# Allegro board front-cover-dvt2-0701.brd
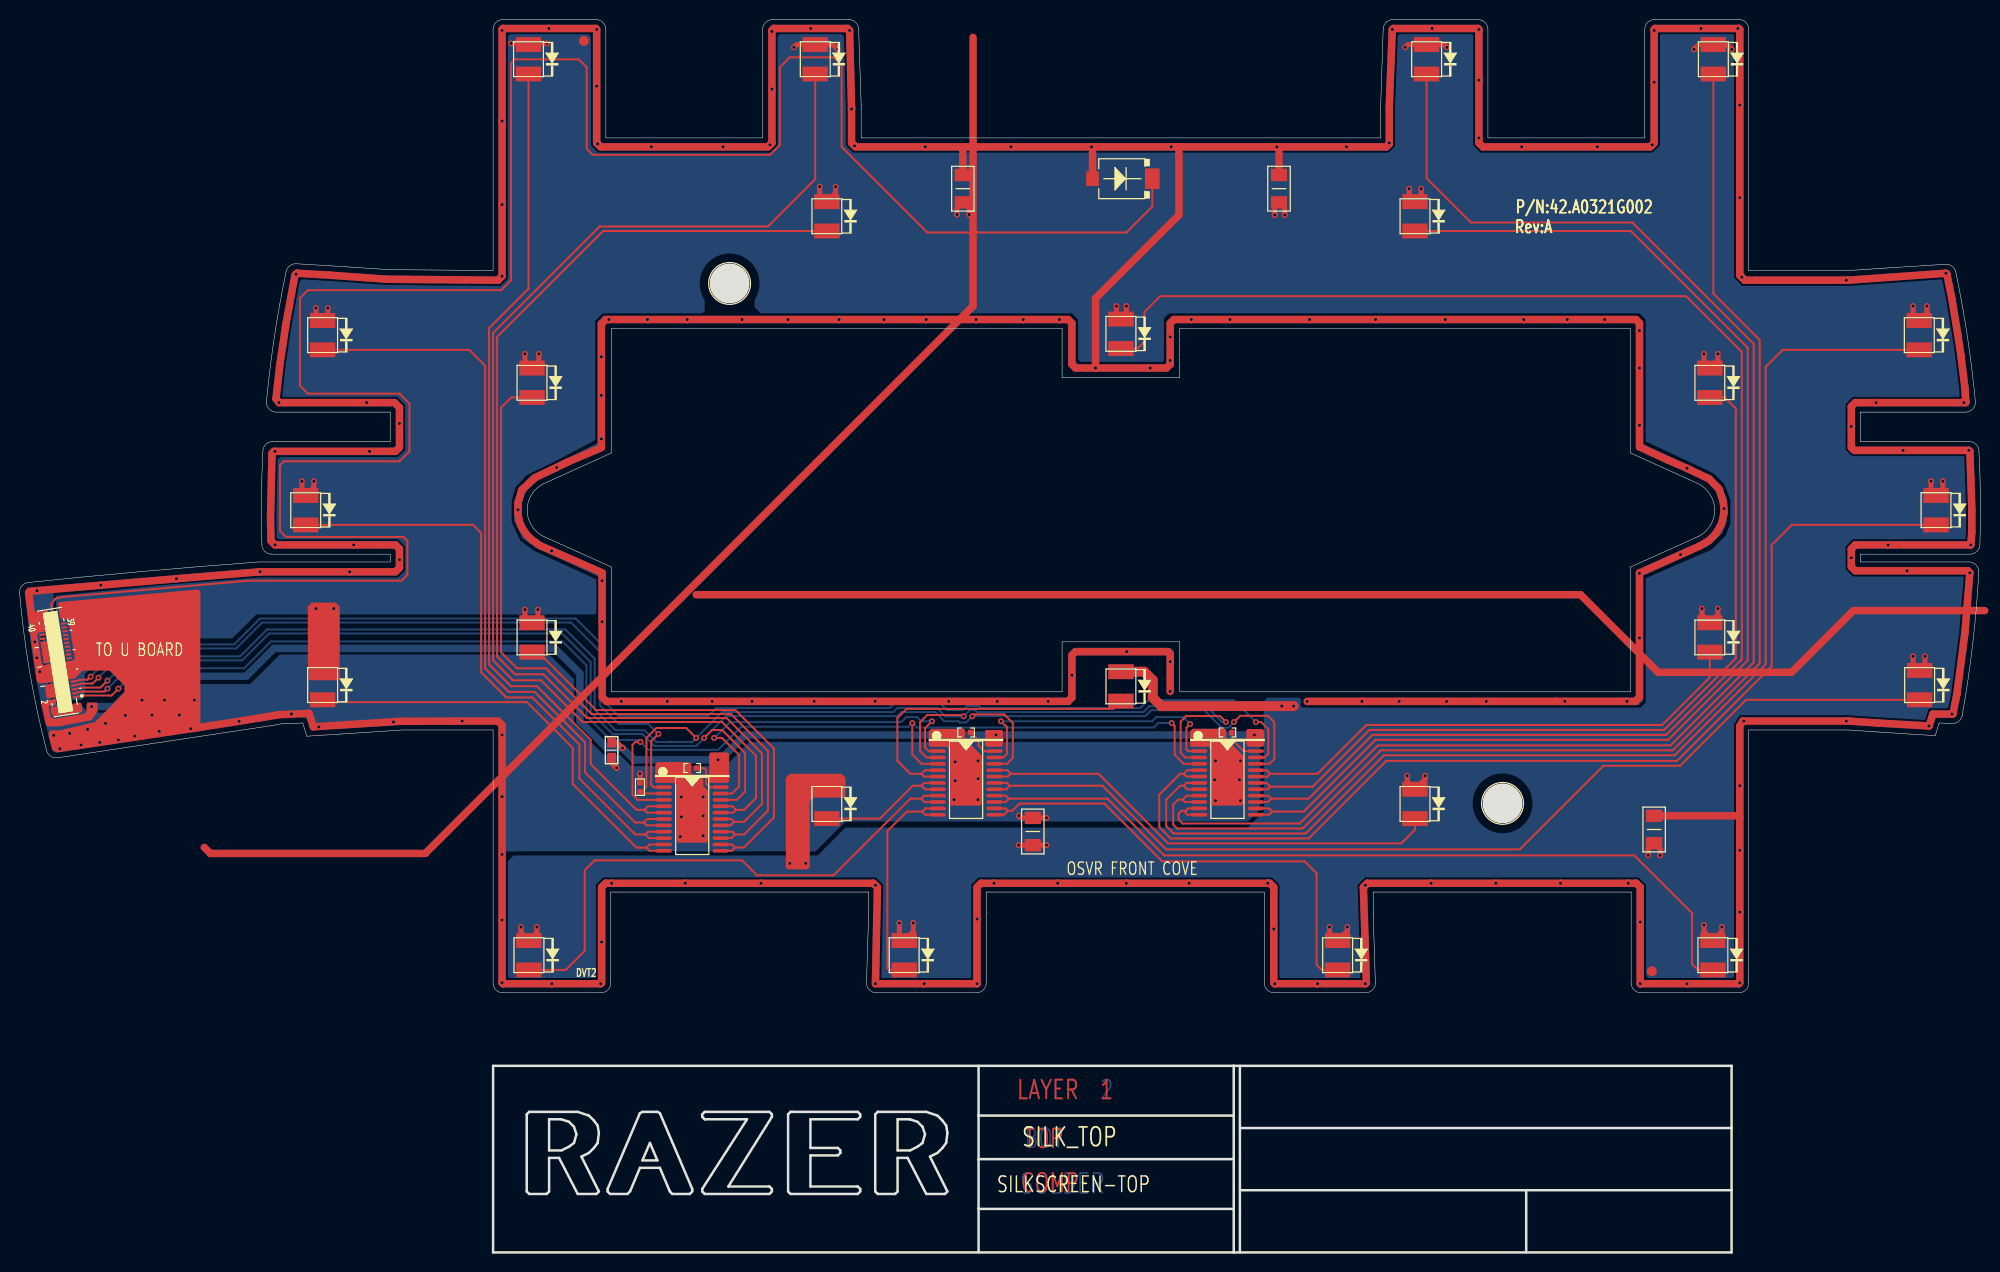
[diagram p0: board, top side]
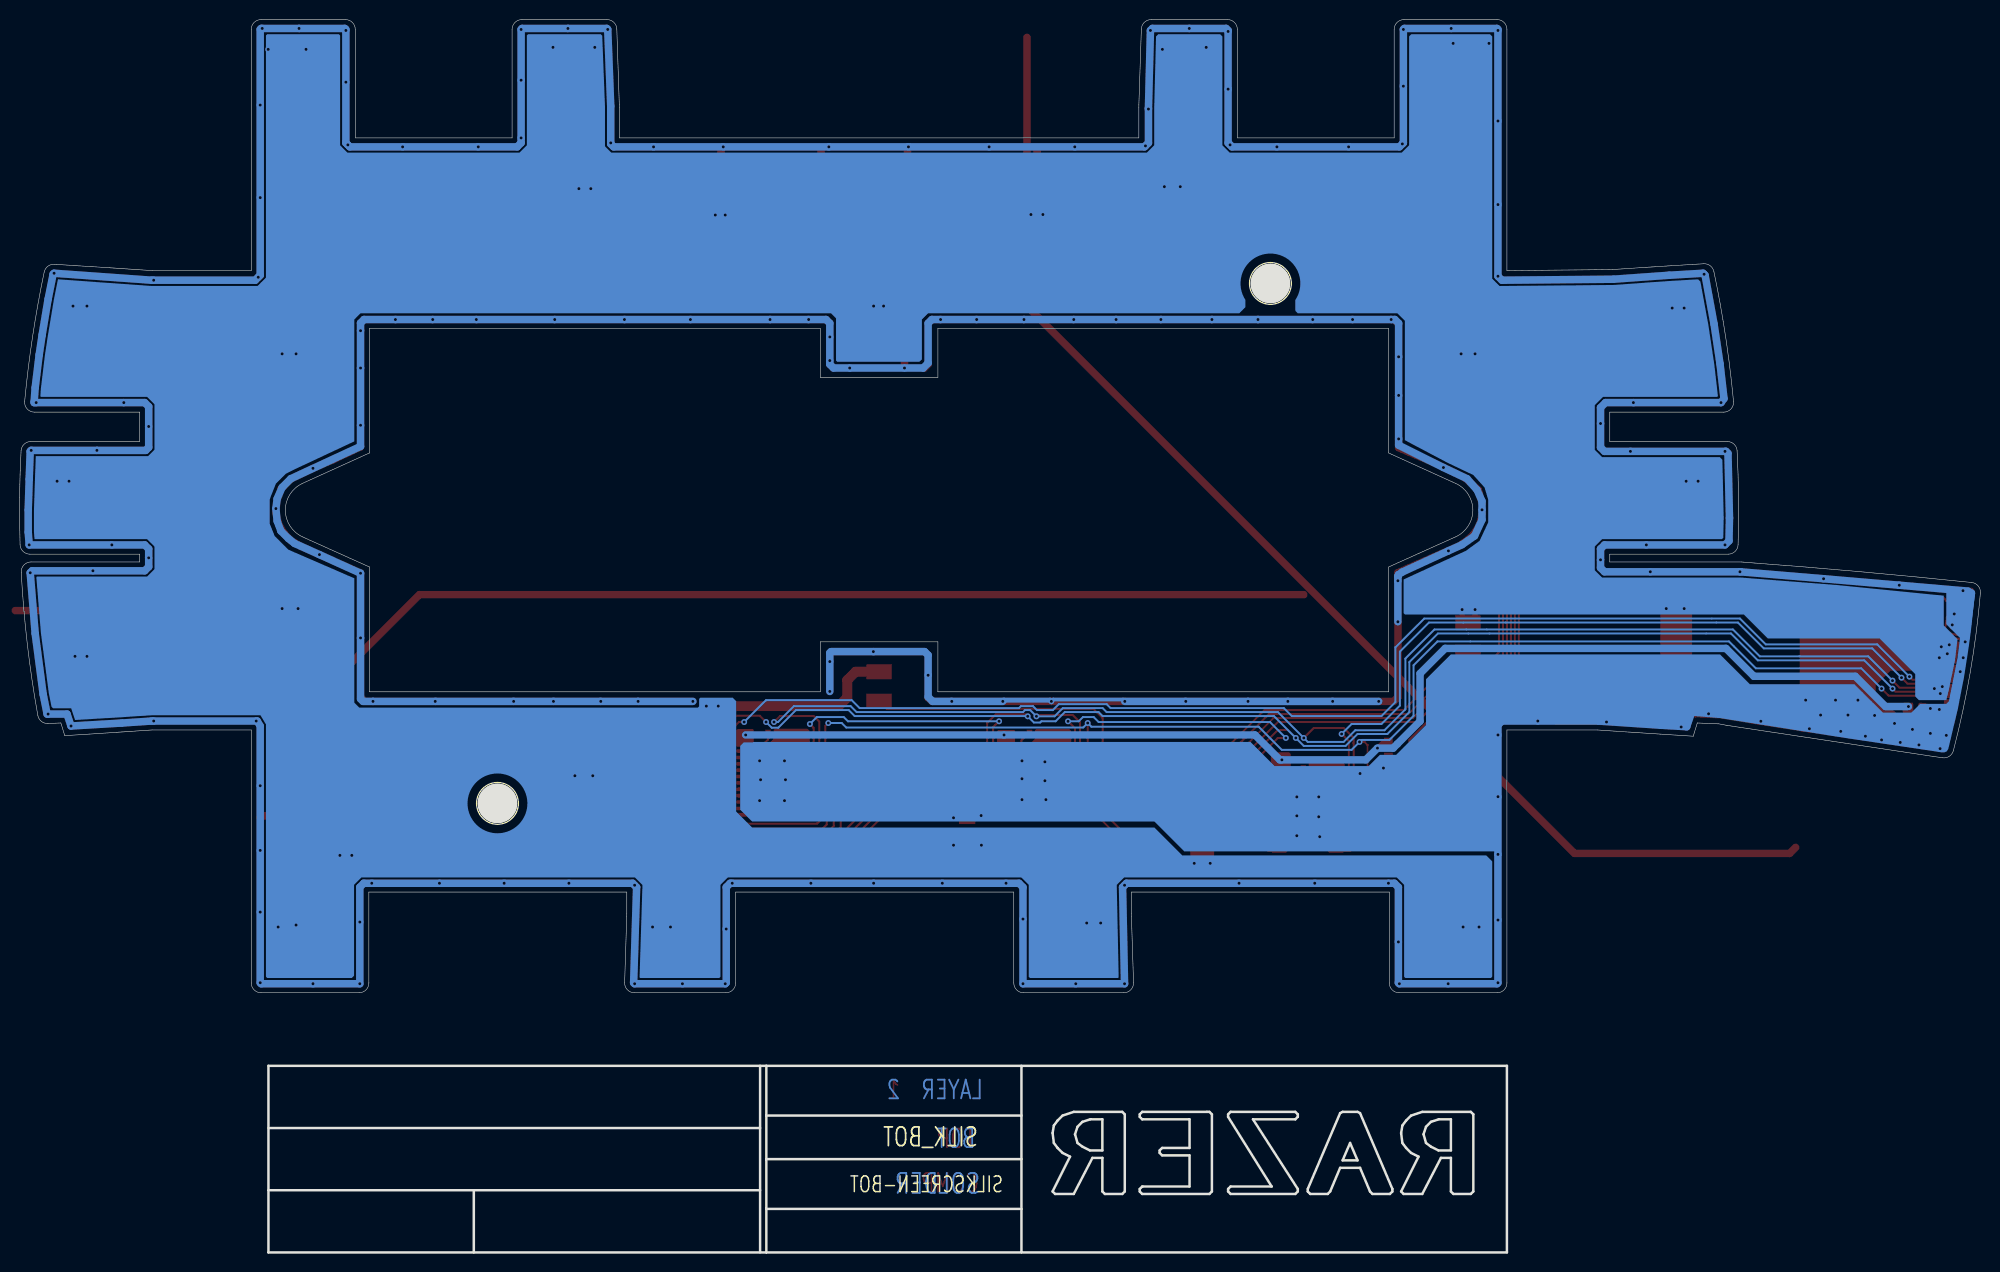
[diagram p1: board, bottom side, seen from below]

Outline 200.06 x 125.87 mm; copper layers: TOP, BOTTOM. Coordinates in mm from the lower left corner of the outline.
Outline path: 190.13,53.1 186.56,53.34 176.43,53.34 176.43,27.51 arc(176.14,26.8) 175.43,26.51 165.43,26.51 arc(164.72,26.8) 164.43,27.51 164.43,36.79 138.11,36.79 138.11,34.62 arc(138.11,34.46) 138.12,34.31 138.33,27.54 arc(138.05,26.82) 137.33,26.51 128,26.51 arc(127.3,26.8) 127,27.51 127,36.79 98.63,36.79 98.63,27.51 arc(98.33,26.8) 97.63,26.51 87.41,26.51 arc(86.69,26.82) 86.41,27.54 86.62,34.31 arc(86.63,34.46) 86.63,34.62 86.63,36.79 60.31,36.79 60.31,27.51 arc(60.02,26.8) 59.31,26.51 49.31,26.51 arc(48.6,26.8) 48.31,27.51 48.31,53.34 39.07,53.34 32.66,52.92 29.3,52.71 arc(29.09,53.38) 28.89,54.06 26.69,53.97 25.95,53.83 25.76,53.8 3.87,50.5 arc(3.17,50.66) 2.75,51.24 arc(1.04,59.22) 0,67.32 arc(0.23,68.05) 0.89,68.4 arc(12.53,69.53) 24.18,70.48 24.4,70.5 37.81,70.5 37.81,71.29 25.72,71.29 arc(25.03,71.58) 24.72,72.26 arc(24.68,77.05) 24.82,81.84 arc(25.13,82.52) 25.82,82.79 37.81,82.79 37.81,85.79 26.19,85.79 arc(25.45,86.12) 25.19,86.89 arc(25.65,90.98) 26.24,95.06 26.28,95.26 arc(26.41,96.05) 26.55,96.84 arc(26.86,98.5) 27.19,100.15 arc(27.57,100.74) 28.23,100.94 29.36,100.88 arc(31.74,100.73) 34.12,100.58 37.57,100.35 48.31,100.24 48.31,124.87 arc(48.6,125.58) 49.31,125.87 58.81,125.87 arc(59.52,125.58) 59.81,124.87 59.81,113.79 75.81,113.79 75.81,124.87 arc(76.11,125.58) 76.81,125.87 84.61,125.87 arc(85.31,125.59) 85.61,124.91 85.86,117.23 arc(85.86,117.07) 85.87,116.92 85.87,113.79 138.87,113.79 138.87,116.92 arc(138.87,117.07) 138.88,117.23 139.13,124.91 arc(139.43,125.59) 140.13,125.87 148.81,125.87 arc(149.52,125.58) 149.81,124.87 149.81,113.79 165.81,113.79 165.81,124.87 arc(166.11,125.58) 166.81,125.87 175.43,125.87 arc(176.14,125.58) 176.43,124.87 176.43,100.24 186.49,100.24 190.92,100.54 ; 190.92,100.54 arc(193.6,100.71) 196.27,100.88 ; 192.97,52.92 arc(191.55,53.01) 190.13,53.1 ; 192.97,52.92 195.46,52.76 arc(195.65,53.41) 195.85,54.06 197.18,54 arc(197.84,54.22) 198.2,54.83 arc(199.28,62.11) 199.9,69.44 arc(199.63,70.19) 198.9,70.5 187.81,70.5 187.81,71.29 199.02,71.29 arc(199.71,71.58) 200.02,72.26 arc(200.06,74.66) 200.06,77.06 arc(200.05,77.73) 200.04,78.39 arc(200.03,78.92) 200.01,79.45 arc(200.01,79.65) 200,79.85 arc(199.96,80.85) 199.91,81.84 arc(199.6,82.52) 198.92,82.79 187.81,82.79 187.81,85.79 198.55,85.79 arc(199.29,86.12) 199.55,86.89 arc(198.74,93.52) 197.55,100.1 arc(197.18,100.69) 196.52,100.89 196.27,100.88 ; 53.56,73.05 arc(51.79,75.78) 53.55,78.52 60.37,81.62 60.37,94.34 106.37,94.34 106.37,89.34 118.37,89.34 118.37,94.34 164.37,94.34 164.37,81.62 171.19,78.52 arc(172.95,75.78) 171.18,73.05 164.37,69.99 164.37,57.24 118.37,57.24 118.37,62.34 106.37,62.34 106.37,57.24 60.37,57.24 60.37,69.99 53.56,73.05

## Placement (name value [footprint] x y rotation side)
C301  10uF  [C0603]  60.4 51.28 270 top
C302  47uF  [C1206]  103.38 42.98 90 top
C303  NC_47uF  [C1206]  166.78 43.18 90 top
C304  47uF  [C1206]  128.5 108.61 90 top
C305  NC_47uF  [C1206]  96.24 108.61 90 top
C306  22PF  [C0402]  63.3 47.5 90 top
FPC  TP_1mm  [TPC30T]  112.52 116.84 0 top
LED17  SFH 4253  [OSRAM_SFH4253]  51.92 121.82 0 top
LED18  SFH 4253  [OSRAM_SFH4253]  30.91 93.65 0 top
LED19  SFH 4253  [OSRAM_SFH4253]  29.19 75.78 0 top
LED20  SFH 4253  [OSRAM_SFH4253]  30.92 57.92 0 top
LED21  SFH 4253  [OSRAM_SFH4253]  52.28 62.79 0 top
LED22  SFH 4253  [OSRAM_SFH4253]  52.28 88.79 0 top
LED23  SFH 4253  [OSRAM_SFH4253]  82.37 105.79 0 top
LED24  SFH 4253  [OSRAM_SFH4253]  81.18 121.82 0 top
LED25  SFH 4253  [OSRAM_SFH4253]  112.37 57.79 0 top
LED26  SFH 4253  [OSRAM_SFH4253]  82.37 45.79 0 top
LED27  SFH 4253  [OSRAM_SFH4253]  51.97 30.34 0 top
LED28  SFH 4253  [OSRAM_SFH4253]  90.26 30.34 0 top
LED29  SFH 4253  [OSRAM_SFH4253]  134.48 30.34 0 top
LED30  SFH 4253  [OSRAM_SFH4253]  172.77 30.34 0 top
LED31  SFH 4253  [OSRAM_SFH4253]  193.86 57.92 0 top
LED32  SFH 4253  [OSRAM_SFH4253]  142.37 45.79 0 top
LED33  SFH 4253  [OSRAM_SFH4253]  195.54 75.78 0 top
LED34  SFH 4253  [OSRAM_SFH4253]  193.82 93.65 0 top
LED35  SFH 4253  [OSRAM_SFH4253]  172.82 121.82 0 top
LED36  SFH 4253  [OSRAM_SFH4253]  143.56 121.82 0 top
LED37  SFH 4253  [OSRAM_SFH4253]  142.37 105.79 0 top
LED38  SFH 4253  [OSRAM_SFH4253]  112.37 93.79 0 top
LED39  SFH 4253  [OSRAM_SFH4253]  172.46 88.79 0 top
LED40  SFH 4253  [OSRAM_SFH4253]  172.46 62.79 0 top
LED41  BPW34S-Z  [BPW34S]  112.52 109.63 0 top
M1  HOLEC47040N_NPTH  [HOLEC158D158N]  72.44 98.93 0 top
M2  HOLEC47040N_NPTH  [HOLEC158D158N]  151.31 45.85 0 top
NOREF  -  [unnamed]  57.58 123.7 0 top
NOREF#2  -  [#2]  48.31 0 0 top
NOREF#3  -  [unnamed]  166.55 28.7 0 top
P300  JAE-WP7B-S040VA1  [JAE_WP7B-SXXXVA1]  3.91 60.27 279 top
R300  330  [R0402]  68.63 49.45 0 top
R301  330  [R0402]  96.57 53.09 0 top
R302  330  [R0402]  123.24 53.09 0 top
U300  STP16CPC26XTR  [TSSOP24-G]  68.63 44.58 270 top
U301  STP16CPC26XTR  [TSSOP24-G]  96.57 48.26 270 top
U302  STP16CPC26XTR  [TSSOP24-G]  123.24 48.26 270 top

## Library data of the parts
C301-C306 = CAP_0
FPC = T POINT R
LED17-LED40 = LED55BF/TO_3
LED41 = LED55BF/TO_1
M1 M2 = Mounting Hole
P300 = CON34_0
R300-R302 = R_RP_3
U300-U302 = STP16CPC26XTR_0

## Footprints (pads in the part's own frame, mm; a bottom-side part is the same pattern mirrored in y, then rotated)
BPW34S
  rect 1.295x1.499 smd: A(-3.05,0)
  rect 1.499x2.108 smd: C(3.05,0)
C0402
  rect 0.559x0.559 smd: 1(-0.457,0) 2(0.457,0)
C0603
  rect 1.016x0.889 smd: 1(-0.775,0) 2(0.775,0)
C1206
  rect 1.27x1.651 smd: 1(-1.397,0) 2(1.397,0)
HOLEC158D158N
  round 4.013 hole 4.013 unplated: (0,0)
JAE_WP7B-SXXXVA1
  rect 0.229x0.533 smd: 1(3.8,1.2) 2(3.8,-1.2) 3(3.4,1.2) 4(3.4,-1.2) 5(3,1.2) 6(3,-1.2) 7(2.6,1.2) 8(2.6,-1.2) 9(2.2,1.2) 10(2.2,-1.2) 11(1.8,1.2) 12(1.8,-1.2) 13(1.4,1.2) 14(1.4,-1.2) 15(1,1.2) 16(1,-1.2) 17(0.6,1.2) 18(0.6,-1.2) 19(0.2,1.2) 20(0.2,-1.2) 21(-0.2,1.2) 22(-0.2,-1.2) 23(-0.6,1.2) 24(-0.6,-1.2) 25(-1,1.2) 26(-1,-1.2) 27(-1.4,1.2) 28(-1.4,-1.2) 29(-1.8,1.2) 30(-1.8,-1.2) 31(-2.2,1.2) 32(-2.2,-1.2) 33(-2.6,1.2) 34(-2.6,-1.2) 35(-3,1.2) 36(-3,-1.2) 37(-3.4,1.2) 38(-3.4,-1.2) 39(-3.8,1.2) 40(-3.8,-1.2)
  rect 0.762x0.508 smd: S1(-4.85,1.2) S2(-4.85,-1.2) S3(4.85,1.2) S4(4.85,-1.2)
OSRAM_SFH4253
  rect 2.591x1.524 smd: A(0,1.5) C(0,-1.5)
R0402
  rect 0.559x0.559 smd: 1(-0.457,0) 2(0.457,0)
TPC30T
  round 0 smd: 1(0,0)
TSSOP24-G
  oval 0.381x1.651 smd: 1(-3.575,-2.9) 2(-2.925,-2.9) 3(-2.275,-2.9) 4(-1.625,-2.9) 5(-0.975,-2.9) 6(-0.325,-2.9) 7(0.325,-2.9) 8(0.975,-2.9) 9(1.625,-2.9) 10(2.275,-2.9) 11(2.925,-2.9) 12(3.575,-2.9) 13(3.575,2.9) 14(2.925,2.9) 15(2.275,2.9) 16(1.625,2.9) 17(0.975,2.9) 18(0.325,2.9) 19(-0.325,2.9) 20(-0.975,2.9) 21(-1.625,2.9) 22(-2.275,2.9) 23(-2.925,2.9) 24(-3.575,2.9)
  rect 4.978x3.2 smd: 25(0,0)
unnamed
  round 1.016 smd: 1(0,0)

## Nets
2.8V_FPC_F: C302.1 C303.1 C304.1 C305.1 LED17.A(ANODE) LED18.A(ANODE) LED19.A(ANODE) LED20.A(ANODE) LED21.A(ANODE) LED22.A(ANODE) LED23.A(ANODE) LED24.A(ANODE) LED25.A(ANODE) LED26.A(ANODE) LED27.A(ANODE) LED28.A(ANODE) LED29.A(ANODE) LED30.A(ANODE) LED31.A(ANODE) LED32.A(ANODE) LED33.A(ANODE) LED34.A(ANODE) LED35.A(ANODE) LED36.A(ANODE) LED37.A(ANODE) LED38.A(ANODE) LED39.A(ANODE) LED40.A(ANODE) P300.4 P300.6 P300.8 P300.10 P300.22 P300.24 P300.26 P300.28 P300.30 P300.32
3.3V_FPC_F: C301.1 P300.2 U300.24(VDD) U301.24(VDD) U302.24(VDD)
DGND_FPC_F: C301.2 C302.2 C303.2 C304.2 C305.2 C306.2 LED41.A(ANODE) P300.11 P300.12 P300.13 P300.14 P300.15 P300.16 P300.17 P300.18 P300.19 P300.20 P300.38 P300.40 P300.S1 P300.S2 P300.S3 P300.S4 R300.1(L) R301.1(L) R302.1(L) U300.1(GND) U300.25(THM_G) U301.1(GND) U301.25(THM_G) U302.1(GND) U302.25(THM_G)
DRVCLK_FPC_F: C306.1 P300.5 U300.3(CLK) U301.3(CLK) U302.3(CLK)
IR_LED_IN_F: LED41.C(CATHODE) P300.36
LATEN_FPC_F: P300.1 U300.4(LE) U301.4(LE) U302.4(LE)
LED17: LED17.C(CATHODE) U300.5(OD0) U300.6(OD1)
LED18: LED18.C(CATHODE) U300.7(OD2) U300.8(OD3)
LED19: LED19.C(CATHODE) U300.9(OD4) U300.10(OD5)
LED20: LED20.C(CATHODE) U300.11(OD6) U300.12(OD7)
LED21: LED21.C(CATHODE) U300.13(OD8) U300.14(OD9)
LED22: LED22.C(CATHODE) U300.15(OD10) U300.16(OD11)
LED23: LED23.C(CATHODE) U300.17(OD12) U300.18(OD13)
LED24: LED24.C(CATHODE) U300.19(OD14) U300.20(OD15)
LED25: LED25.C(CATHODE) U301.5(OD0) U301.6(OD1)
LED26: LED26.C(CATHODE) U301.7(OD2) U301.8(OD3)
LED27: LED27.C(CATHODE) U301.9(OD4) U301.10(OD5)
LED28: LED28.C(CATHODE) U301.11(OD6) U301.12(OD7)
LED29: LED29.C(CATHODE) U301.13(OD8) U301.14(OD9)
LED30: LED30.C(CATHODE) U301.15(OD10) U301.16(OD11)
LED31: LED31.C(CATHODE) U301.17(OD12) U301.18(OD13)
LED32: LED32.C(CATHODE) U301.19(OD14) U301.20(OD15)
LED33: LED33.C(CATHODE) U302.5(OD0) U302.6(OD1)
LED34: LED34.C(CATHODE) U302.7(OD2) U302.8(OD3)
LED35: LED35.C(CATHODE) U302.9(OD4) U302.10(OD5)
LED36: LED36.C(CATHODE) U302.11(OD6) U302.12(OD7)
LED37: LED37.C(CATHODE) U302.13(OD8) U302.14(OD9)
LED38: LED38.C(CATHODE) U302.15(OD10) U302.16(OD11)
LED39: LED39.C(CATHODE) U302.17(OD12) U302.18(OD13)
LED40: LED40.C(CATHODE) U302.19(OD14) U302.20(OD15)
OUTEN_FPC_F: P300.3 U300.21(O\E\) U301.21(O\E\) U302.21(O\E\)
R_EXT_F1: R300.2(R) U300.23(R-EXT)
R_EXT_F2: R301.2(R) U301.23(R-EXT)
R_EXT_F3: R302.2(R) U302.23(R-EXT)
SDI_FPC_F: P300.7 U300.2(SDI)
SDO_FPC_F_101: U300.22(SDO) U301.2(SDI)
SDO_FPC_F_102: U301.22(SDO) U302.2(SDI)
SDO_FPC_F_103: P300.9 U302.22(SDO)

Pads without a net: FPC 1; NOREF 1; NOREF#3 1; P300 21 23 25 27 29 31 33 34 35 37 39

## Via types
v1: diameter 0.61, hole 0.305, TOP to BOTTOM, 304 vias

## Routing (per net, layer and track width the routed paths; a pad name or vN(x,y) marks a point on that pad's centre or on a via; arc(x,y) is an arc through that point)
2.8V_FPC_F: length 108.1
  TOP w0.508: v1(50.14,123.44) 51.8,123.44 LED17.A 52.04,123.44 v1(53.8,123.44) ; v1(129.08,105.92) 129.08,106.63 C304.1 128.07,106.78 v1(128.07,105.92) ; v1(194.41,60.86) 194.41,59.97 LED31.A 193.19,60.09 v1(193.19,60.86) ; v1(166.17,40.54) 166.17,41.17 C303.1 167.39,41.17 v1(167.39,40.54) ; v1(195.02,78.74) 195.02,77.8 LED33.A 196.24,77.98 v1(196.24,78.74) ; v1(133.65,33.22) 133.65,32.67 LED29.A 135.48,32.85 v1(135.48,33.22) ; v1(141.38,123.04) 141.66,123.32 LED36.A 145.36,123.32 v1(145.64,123.04) ; v1(171.86,91.74) 171.86,90.89 LED39.A 173.28,91.11 v1(173.28,91.74) ; v1(52.78,33.22) 52.78,32.66 LED27.A 51.15,32.66 v1(51.15,33.22) ; v1(141.78,108.61) 141.78,107.88 LED37.A 143,107.92 v1(143,108.61) ; v1(96.87,105.97) 96.87,106.58 C305.1 95.66,106.63 v1(95.66,105.97) ; v1(170.84,122.83) 171.33,123.32 LED35.A 174.21,123.32 v1(174.7,122.83) ; v1(52.98,91.74) 52.98,90.99 LED22.A 51.56,91.01 v1(51.56,91.74) ; v1(111.91,96.62) 111.91,95.75 LED38.A 112.93,95.85 v1(112.93,96.62) ; v1(143.41,48.67) 143.41,48.33 LED32.A 141.58,48.08 v1(141.58,48.67) ; v1(173.28,65.74) 173.28,65.11 LED40.A 171.65,65.09 v1(171.65,65.74) ; v1(194.61,96.62) 194.61,95.94 LED34.A 193.19,95.79 v1(193.19,96.62) ; v1(51.56,65.63) 51.56,65.01 LED21.A 52.88,64.89 v1(52.88,65.63) ; v1(31.44,96.42) 31.44,95.68 LED18.A 30.23,95.84 v1(30.23,96.42) ; v1(104.77,41.58) C302.1 v1(101.93,41.58) ; v1(78.99,123.04) 79.28,123.32 LED24.A 82.98,123.32 v1(83.46,122.83) ; v1(91.19,33.63) 91.19,32.77 LED28.A 89.76,32.34 v1(89.76,33.63) ; v1(30.02,78.74) 30.02,78.11 LED19.A 28.8,77.67 v1(28.8,78.74) ; v1(81.63,108.81) 81.63,108.02 LED23.A 83.26,108.18 v1(83.26,108.81) ; v1(173.68,33.22) 173.68,32.76 LED30.A 171.86,32.76 v1(171.86,33.43)
  TOP w1.016: v1(130,55.78) v1(128.78,55.78) 116.48,55.78 115.62,56.64 115.62,58.42 114.75,59.29 LED25.A
  vias: v1(3.18,62.04) v1(3.38,61.12) v1(3.89,57.77) v1(3.99,61.83) v1(4.09,57.06) v1(4.19,60.72) v1(4.7,57.57) v1(30.23,65.74) v1(32.05,65.74) v1(78.59,39.73) v1(80.21,39.73)
3.3V_FPC_F: length 131.3
  TOP w0.381: 99.47,52.68 v1(99.62,52.83)
  TOP w0.508: v1(61.52,51.49) 60.95,52.06 C301.1
  BOTTOM w0.762: v1(125.98,52.83) v1(99.62,52.83) 74.01,52.83 71.47,50.29 v1(71.27,50.29) 62.71,50.29 v1(61.52,51.49) 59.92,51.49 57.17,54.23 57.17,59.11 54.61,61.67 25.96,61.67 23.11,58.83 12.77,58.83 9.68,55.74 v1(7.34,55.74)
DGND_FPC_F: length 2230.8
  TOP w0.381: R301.1 96.11,51.52 ; 96.11,51.52 95.88,51.75 ; 96.11,51.52 96.57,51.07 U301.25
  TOP w0.508: v1(60.91,49.45) 60.4,49.96 C301.2 ; v1(104.77,44.37) C302.2 102.18,44.37 v1(101.95,44.6) ; C306.2 v1(63.3,48.9)
  TOP w0.762: C303.2 175.34,44.58 175.51,44.4 ; v1(109.78,90.3) 107.75,90.3 107.37,90.68 107.37,94.87 106.98,95.25 v1(106.1,95.25) v1(102.41,95.25) v1(97.59,95.25) v1(92.51,95.25) v1(88.19,95.25) v1(83.62,95.25) v1(78.41,95.25) v1(73.71,95.25) v1(68.12,95.25) v1(64.06,95.25) v1(60.12,95.25) 59.82,95.25 59.36,94.79 v1(59.36,91.44) v1(59.36,87.5) v1(59.36,83.06) 59.36,82.17 55.8,80.65 52.63,79.12 51.23,77.85 50.85,76.45 v1(50.85,75.82) 50.85,75.44 50.98,74.68 51.23,74.04 51.74,73.28 52.3,72.75 53.14,72.16 59.44,69.39 v1(59.44,68.58) v1(59.44,64.39) 59.44,56.69 59.87,56.26 v1(61.39,56.26) v1(66.09,56.26) v1(70.66,56.26) v1(74.73,56.26) v1(81.08,56.26) v1(87.3,56.26) v1(94.79,56.26) v1(99.75,56.26) v1(104.95,56.26) 106.98,56.26 107.37,56.64 v1(107.37,58.93) 107.37,60.96 107.75,61.34 v1(112.95,61.34) 117.14,61.34 117.4,61.09 v1(117.4,60.33) v1(117.4,57.28) ; v1(109.78,90.3) v1(115.37,90.3) 117.02,90.3 117.4,90.68 v1(117.4,91.06) v1(117.4,93.47) 117.4,94.87 117.78,95.25 v1(119.56,95.25) v1(123.49,95.25) v1(131.62,95.25) v1(138.35,95.25) v1(145.47,95.25) v1(153.47,95.25) v1(157.91,95.25) v1(161.72,95.25) 164.92,95.25 165.28,94.89 v1(165.28,94.11) v1(165.28,90.3) v1(165.28,84.45) 165.28,82.25 168.17,80.9 v1(170.13,80.06) 172.39,78.97 173.41,77.93 173.84,76.58 173.91,75.51 173.63,74.35 173.07,73.41 172.36,72.67 171.4,72.11 165.3,69.39 165.28,69.37 v1(165.28,69.34) v1(165.28,62.74) 165.28,56.69 164.85,56.26 v1(164.01,56.26) v1(157.66,56.26) v1(149.66,56.26) v1(145.59,56.26) v1(140.77,56.26) v1(136.96,56.26) v1(131.37,56.26) ; v1(109.78,90.3) 109.78,97.41 118.29,105.92 118.29,112.88 ; C305.2 96.24,112.8 96.32,112.88 ; 175.51,44.4 v1(175.51,47.65) 175.51,53.75 175.82,54.25 v1(175.92,54.25) v1(186.38,54.25) 186.59,54.25 189.64,54.05 v1(194.82,53.75) 195.22,54.97 v1(197.15,54.97) 197.26,54.97 197.66,57 198.47,63.2 v1(198.98,69.39) 198.78,69.6 v1(192.58,69.6) 187.3,69.6 186.89,70 v1(186.89,70.92) 186.89,71.83 187.3,72.24 v1(190.65,72.24) v1(199.08,72.24) 199.19,73.56 199.19,75.79 199.08,78.94 198.98,81.79 v1(198.88,81.89) v1(192.18,81.89) 187.2,81.89 186.89,82.19 v1(186.89,84.33) 186.89,86.36 187.3,86.77 v1(189.43,86.77) v1(198.37,86.77) 198.58,86.77 198.58,86.87 198.47,88.29 198.07,91.64 197.76,93.68 197.15,97.33 196.65,99.87 v1(196.54,99.97) 186.59,99.26 v1(186.38,99.26) 176.02,99.26 v1(175.72,99.57) 175.51,99.77 v1(175.51,107.7) v1(175.51,117.14) 175.51,124.87 175.41,124.97 v1(175.31,124.97) v1(171.55,124.97) 166.88,124.97 166.78,124.87 v1(166.78,124.76) v1(166.78,119.48) 166.78,113.28 v1(166.57,113.08) 166.37,112.88 v1(160.98,112.88) v1(153.26,112.88) 149.3,112.88 148.89,113.28 v1(148.89,113.79) v1(148.89,119.68) v1(148.89,124.87) 148.79,124.97 v1(144.12,124.97) 140.16,124.97 v1(140.05,124.87) 139.75,117.04 v1(139.75,113.28) 139.75,113.18 139.45,112.88 v1(135.38,112.88) v1(128.27,112.88) ; 175.51,44.4 v1(175.51,41.05) v1(175.51,34.75) v1(175.51,27.53) 175.41,27.43 v1(170.13,27.43) v1(165.35,27.43) v1(165.35,33.73) 165.35,37.29 164.95,37.69 v1(164.13,37.69) v1(157.23,37.69) v1(150.62,37.69) v1(144.02,37.69) 137.51,37.69 v1(137.31,37.49) 137.11,37.29 137.41,27.53 v1(137.31,27.43) v1(132.43,27.43) v1(128.07,27.43) 127.96,27.53 v1(127.96,33.02) 127.96,37.29 127.56,37.69 v1(127.35,37.69) v1(119.33,37.69) v1(112.93,37.69) v1(105.92,37.69) v1(99.41,37.69) 98.09,37.69 97.69,37.29 v1(97.69,34.04) v1(97.69,27.43) v1(92.3,27.43) v1(87.32,27.43) 87.53,37.29 v1(87.32,37.49) 87.12,37.69 v1(75.64,37.69) v1(67.92,37.69) v1(60.4,37.69) 59.79,37.69 59.38,37.29 v1(59.38,31.7) 59.38,27.53 v1(59.28,27.43) v1(54.3,27.43) 49.33,27.43 v1(49.22,27.53) v1(49.22,33.93) v1(49.22,40.64) v1(49.22,46.53) v1(49.22,52.83) 49.22,53.85 48.82,54.25 v1(45.16,54.25) 38.86,54.23 37.26,54.13 29.97,53.67 29.54,55.04 29.08,55.02 26.26,54.89 ; v1(17.45,53.47) v1(22.4,54.23) 26.26,54.86 ; LED41.A 109.47,112.78 v1(109.37,112.88) ; 96.32,112.88 v1(92.4,112.88) 85.29,112.88 v1(85.19,112.98) 84.89,113.28 v1(84.89,116.74) 84.89,116.84 v1(84.68,124.76) 84.48,124.97 v1(80.72,124.97) 76.96,124.97 76.76,124.76 v1(76.76,124.66) v1(76.76,118.77) 76.76,113.28 v1(76.55,113.08) 76.35,112.88 v1(71.78,112.88) v1(64.46,112.88) 59.28,112.88 v1(58.98,113.18) 58.88,113.28 v1(58.88,119.08) v1(58.88,124.87) 58.77,124.97 v1(54,124.97) 49.33,124.97 49.22,124.87 v1(49.22,124.76) v1(49.22,115.52) v1(49.22,106.98) v1(49.22,99.67) 48.82,99.26 37.44,99.36 31.75,99.77 28.29,99.97 v1(28.19,99.87) 28.09,99.77 27.18,94.79 26.57,90.73 26.16,87.17 v1(26.47,86.77) v1(35.41,86.77) 38.25,86.77 38.76,86.26 v1(38.76,84.63) 38.76,82.19 38.35,81.79 v1(35.71,81.79) v1(26.06,81.79) 25.96,81.79 25.75,81.58 25.6,74.98 25.65,72.64 v1(26.06,72.24) v1(34.09,72.24) 38.35,72.24 38.76,71.83 v1(38.76,70.71) 38.76,69.9 38.35,69.49 v1(33.68,69.49) v1(24.54,69.49) ; 96.32,112.88 v1(101.14,112.88) v1(109.37,112.88) ; v1(128.27,112.88) 118.29,112.88 ; v1(128.27,112.88) 128.5,112.65 C304.2 ; 118.29,112.88 v1(117.5,112.88) v1(109.37,112.88) ; v1(24.54,69.49) v1(16,68.78) v1(8.28,68.12) v1(1.78,67.56) 1.02,67.49 0.94,67.39 0.96,67.06 1.04,66.41 1.25,64.78 ; v1(24.54,69.49) 24.43,69.49
  BOTTOM w0.381: v1(94.79,56.26) 94.6,56.45 87.49,56.45 v1(87.3,56.26)
  BOTTOM w0.508: v1(99.75,56.26) 99.62,56.39 94.92,56.39 v1(94.79,56.26)
  BOTTOM w0.762: v1(117.4,57.28) v1(117.4,60.33) 117.4,61.21 117.27,61.34 v1(112.95,61.34) 107.72,61.34 107.37,60.99 v1(107.37,58.93) 107.37,56.72 106.91,56.26 v1(104.95,56.26) v1(99.75,56.26) ; v1(131.37,56.26) v1(136.96,56.26) v1(140.77,56.26) v1(145.59,56.26) v1(149.66,56.26) v1(157.66,56.26) v1(164.01,56.26) 165.02,56.26 165.28,56.52 v1(165.28,62.74) v1(165.28,69.34) v1(169.47,71.25) 172.01,72.39 172.64,72.9 173.41,73.66 173.79,74.68 v1(173.91,75.95) 173.79,76.96 173.28,78.11 172.39,78.99 165.28,82.3 v1(165.28,84.45) v1(165.28,90.3) v1(165.28,94.11) 165.28,94.89 164.92,95.25 v1(161.72,95.25) v1(157.91,95.25) v1(153.47,95.25) v1(145.47,95.25) v1(138.35,95.25) v1(131.62,95.25) v1(123.49,95.25) v1(119.56,95.25) 117.78,95.25 117.4,94.87 v1(117.4,93.47) v1(117.4,91.06) 117.4,90.68 117.02,90.3 v1(115.37,90.3) v1(109.78,90.3) 107.87,90.3 107.37,90.81 107.37,94.87 106.98,95.25 v1(106.1,95.25) v1(102.41,95.25) v1(97.59,95.25) v1(92.51,95.25) v1(88.19,95.25) v1(83.62,95.25) v1(78.41,95.25) v1(73.71,95.25) v1(68.12,95.25) v1(64.06,95.25) v1(60.12,95.25) 59.74,95.25 59.36,94.87 v1(59.36,91.44) v1(59.36,87.5) v1(59.36,83.06) 59.36,82.42 v1(54.79,80.14) 52.37,78.99 51.36,77.85 50.85,76.71 v1(50.85,75.82) 50.85,74.8 51.61,73.15 52.88,72.26 v1(54.28,71.63) 58.98,69.47 59.38,69.2 59.41,69.04 59.44,69.01 v1(59.44,68.58) v1(59.44,64.39) ; v1(61.39,56.26) v1(66.09,56.26) v1(70.66,56.26) v1(74.73,56.26) v1(81.08,56.26) v1(87.3,56.26) ; v1(24.54,69.49) v1(33.68,69.49) 38.35,69.49 38.76,69.9 v1(38.76,70.71) 38.76,71.83 38.35,72.24 v1(34.09,72.24) v1(26.06,72.24) 25.65,72.64 25.6,74.98 25.75,81.58 25.96,81.79 v1(26.06,81.79) v1(35.71,81.79) 38.35,81.79 38.76,82.19 v1(38.76,84.63) 38.76,86.26 38.25,86.77 v1(35.41,86.77) v1(26.47,86.77) 26.16,87.17 26.57,90.73 27.18,94.79 28.09,99.77 v1(28.19,99.87) 28.29,99.97 31.75,99.77 37.44,99.36 48.82,99.26 v1(49.22,99.67) v1(49.22,106.98) v1(49.22,115.52) v1(49.22,124.76) 49.22,124.87 49.33,124.97 v1(54,124.97) 58.77,124.97 v1(58.88,124.87) v1(58.88,119.08) 58.88,113.28 v1(58.98,113.18) 59.28,112.88 v1(64.46,112.88) v1(71.78,112.88) 76.35,112.88 v1(76.55,113.08) 76.76,113.28 v1(76.76,118.77) v1(76.76,124.66) 76.76,124.76 76.96,124.97 v1(80.72,124.97) 84.48,124.97 v1(84.68,124.76) 84.89,116.84 v1(84.89,116.74) 84.89,113.28 v1(85.19,112.98) 85.29,112.88 v1(92.4,112.88) v1(101.14,112.88) v1(109.37,112.88) v1(117.5,112.88) v1(128.27,112.88) v1(135.38,112.88) 139.45,112.88 139.75,113.18 v1(139.75,113.28) 139.75,117.04 v1(140.05,124.87) 140.16,124.97 v1(144.12,124.97) 148.79,124.97 v1(148.89,124.87) v1(148.89,119.68) v1(148.89,113.79) 148.89,113.28 149.3,112.88 v1(153.26,112.88) v1(160.98,112.88) 166.37,112.88 v1(166.57,113.08) 166.78,113.28 v1(166.78,119.48) v1(166.78,124.76) 166.78,124.87 166.88,124.97 v1(171.55,124.97) v1(175.31,124.97) 175.41,124.97 175.51,124.87 v1(175.51,117.14) v1(175.51,107.7) 175.51,99.77 v1(175.72,99.57) 176.02,99.26 v1(186.38,99.26) 186.59,99.26 v1(196.54,99.97) 196.65,99.87 197.15,97.33 197.76,93.68 198.07,91.64 198.47,88.29 198.58,86.87 198.58,86.77 v1(198.37,86.77) v1(189.43,86.77) 187.3,86.77 186.89,86.36 v1(186.89,84.33) 186.89,82.19 187.2,81.89 v1(192.18,81.89) v1(198.88,81.89) 198.98,81.79 199.08,78.94 199.19,75.79 199.19,73.56 v1(199.08,72.24) v1(190.65,72.24) 187.3,72.24 186.89,71.83 v1(186.89,70.92) 186.89,70 187.3,69.6 v1(192.58,69.6) 198.78,69.6 v1(198.98,69.39) 198.47,63.2 197.66,57 197.26,54.97 v1(197.15,54.97) 195.22,54.97 v1(194.82,53.75) 189.64,54.05 186.59,54.25 v1(186.38,54.25) v1(175.92,54.25) 175.82,54.25 175.51,53.75 v1(175.51,47.65) v1(175.51,41.05) v1(175.51,34.75) v1(175.51,27.53) 175.41,27.43 v1(170.13,27.43) v1(165.35,27.43) v1(165.35,33.73) 165.35,37.29 164.95,37.69 v1(164.13,37.69) v1(157.23,37.69) v1(150.62,37.69) v1(144.02,37.69) 137.51,37.69 v1(137.31,37.49) 137.11,37.29 137.41,27.53 v1(137.31,27.43) v1(132.43,27.43) v1(128.07,27.43) 127.96,27.53 v1(127.96,33.02) 127.96,37.29 127.56,37.69 v1(127.35,37.69) v1(119.33,37.69) v1(112.93,37.69) v1(105.92,37.69) v1(99.41,37.69) 98.09,37.69 97.69,37.29 v1(97.69,34.04) v1(97.69,27.43) v1(92.3,27.43) v1(87.32,27.43) 87.53,37.29 v1(87.32,37.49) 87.12,37.69 v1(75.64,37.69) v1(67.92,37.69) v1(60.4,37.69) 59.79,37.69 59.38,37.29 v1(59.38,31.7) 59.38,27.53 v1(59.28,27.43) v1(54.3,27.43) 49.33,27.43 v1(49.22,27.53) v1(49.22,33.93) v1(49.22,40.64) v1(49.22,46.53) v1(49.22,52.83) 49.22,53.85 48.82,54.25 v1(45.16,54.25) 38.96,54.25 32.59,53.82 30.76,53.72 29.97,53.67 29.51,54.99 ; v1(24.54,69.49) v1(16,68.78) v1(8.28,68.12) v1(1.78,67.56) 1.27,67.51 0.91,67.31 v1(1.55,62.34) ; v1(24.54,69.49) 24.43,69.49
  vias: v1(1.75,60.72) v1(2.06,59.29) v1(2.67,65.19) v1(2.87,64.07) v1(3.48,52.79) v1(4.11,51.44) v1(4.19,55.43) v1(5.11,55.53) v1(5.11,52.99) v1(6.27,51.82) v1(6.93,53.4) v1(8.18,52.07) v1(8.76,54.01) v1(10.08,52.32) v1(10.8,54.82) v1(11.73,52.71) v1(12.5,56.39) v1(13.51,54.86) v1(14.25,53.2) v1(14.78,56.39) v1(16.31,54.86) v1(17.83,56.39) v1(27.74,54.99) v1(30.53,53.64) v1(38.15,54.15) v1(67.41,42.44) v1(67.51,46.51) v1(67.51,44.48) v1(69.75,46.51) v1(69.75,44.58) v1(69.75,42.55) v1(95.35,46.23) v1(95.45,50.09) v1(95.45,48.16) v1(97.79,50.19) v1(97.79,48.36) v1(97.79,46.23) v1(121.92,48.26) v1(122.02,50.19) v1(122.02,46.13) v1(124.46,48.26) v1(124.56,50.19) v1(124.56,46.13)
DRVCLK_FPC_F: length 165.3
  TOP w0.203: v1(69.04,52.53) 68.02,53.54 64.97,53.54 63.96,52.53 63.96,47.52 63.47,47.04 C306.1 63.48,46.85 U300.3 ; v1(8.97,58.38) 8.26,57.67 6.29,57.67 P300.5 ; U301.3 92.52,50.54 91.87,51.18 91.87,54.13 92.61,54.86 96.19,54.86 v1(96.32,54.74) ; U302.3 118.93,50.54 118.46,51 118.46,54.2 119.02,54.76 122.48,54.76 v1(123.09,54.15)
  BOTTOM w0.203: v1(8.97,58.38) 11.45,60.86 22.5,60.86 25.25,63.6 55.7,63.6 58.67,60.63 58.67,55.44 60.8,53.31 63.78,53.31 64.97,52.12 68.63,52.12 v1(69.04,52.53) 71.68,55.17 89.15,55.17 89.56,55.58 93.62,55.58 94.46,54.74 v1(96.32,54.74) 96.95,55.37 97.48,55.37 97.69,55.17 114.66,55.17 115.27,55.78 121.06,55.78 122.68,54.15 v1(123.09,54.15)
IR_LED_IN_F: length 248.2
  TOP w0.203: LED41.C 115.57,106.78 112.93,104.14 92.61,104.14 83.87,112.88 83.87,121.21 83.06,122.02 78.59,122.02 77.57,121.01 77.57,113.08 76.55,112.06 58.47,112.06 57.86,112.67 57.86,121.01 57.05,121.82 50.55,121.82 50.14,121.41 50.14,99.26 49.12,98.25 29.41,98.25 28.6,97.43 28.6,88.49 29.41,87.68 38.76,87.68 39.78,86.66 39.78,81.79 38.76,80.77 26.97,80.77 26.57,80.37 26.57,73.66 27.18,73.05 39.17,73.05 39.57,72.64 39.57,69.19 38.96,68.58 23.29,68.58 4.5,66.93 3.73,66.8 3.61,66.68 3.23,66.17 3.61,63.63 3.35,63.43 2.93,63.16 P300.36
LATEN_FPC_F: length 145.2
  TOP w0.203: v1(91.08,54.05) 91.08,50.83 92.02,49.89 U301.4 ; v1(117.55,54.05) 117.86,53.75 117.86,50.8 118.77,49.89 U302.4 ; v1(10.08,57.57) 9.37,56.86 6.49,56.86 P300.1 ; v1(63.35,52.12) 62.84,52.12 62.53,51.82 62.53,46.74 63.07,46.2 U300.4
  BOTTOM w0.203: v1(117.55,54.05) 116.18,54.05 115.72,53.59 91.54,53.59 v1(91.08,54.05) 90.71,53.67 73.64,53.67 71.27,51.31 64.16,51.31 v1(63.35,52.12) 63.14,52.32 60.3,52.32 57.84,54.79 57.84,59.94 55.4,62.38 25.65,62.38 22.91,59.64 12.16,59.64 v1(10.08,57.57)
LED17: length 89.6
  TOP w0.203: U300.6 64.04,44.9 63.75,45.19 ; U300.5 64.12,45.55 63.75,45.19 ; 63.75,45.19 62.94,45.19 58.27,49.86 58.27,52.32 52.78,57.81 50.14,57.81 47.9,60.05 47.9,94.39 51.92,98.4 LED17.C
LED18: length 77
  TOP w0.203: U300.8 63.97,43.6 63.68,43.89 ; 63.68,43.89 64.04,44.25 U300.7 ; 63.68,43.89 62.81,43.89 57.69,49.01 57.69,52.09 52.54,57.24 49.9,57.24 47.5,59.64 47.5,90.53 45.87,92.15 LED18.C
LED19: length 62.1
  TOP w0.203: LED19.C 46.27,74.28 47.09,73.46 47.09,59.23 49.66,56.66 52.3,56.66 57.12,51.85 57.12,48.37 62.81,42.67 63.85,42.67 ; U300.9 64.13,42.95 63.85,42.67 ; 63.85,42.67 64.22,42.3 U300.10
LED20: length 45.3
  TOP w0.203: U300.11 64.28,41.65 63.96,41.33 ; LED20.C 31.16,56.18 51.76,56.18 56.44,51.51 56.44,47.83 62.94,41.33 63.96,41.33 ; U300.12 64.28,41 63.96,41.33
LED21: length 44.2
  TOP w0.203: LED21.C 52.9,61.29 58.82,55.37 73.05,55.37 76.96,51.46 76.96,44.4 73.91,41.35 73,41.35 ; U300.13 72.65,41 73,41.35 ; U300.14 72.7,41.65 73,41.35
LED22: length 73.6
  TOP w0.203: LED22.C 50.15,87.29 49.12,86.26 49.12,61.26 50.75,59.64 53.69,59.64 58.37,54.97 72.59,54.97 76.35,51.2 76.35,45.11 73.92,42.68 73,42.68 ; 73,42.68 72.72,42.95 U300.16 ; 73,42.68 72.62,42.3 U300.15
LED23: length 113.6
  TOP w0.203: LED23.C 59.53,104.29 48.72,93.47 48.72,60.86 50.55,59.03 53.44,59.03 57.91,54.56 72.13,54.56 75.74,50.95 75.74,45.8 73.91,43.97 72.9,43.97 ; 72.9,43.97 72.61,44.25 U300.18 ; 72.9,43.97 72.53,43.6 U300.17
LED24: length 124.6
  TOP w0.203: 73.1,45.19 73.91,45.19 75.13,46.41 75.13,50.7 71.68,54.15 57.45,54.15 53.19,58.42 50.34,58.42 48.31,60.45 48.31,93.88 59.18,104.75 76.35,104.75 81.18,109.58 LED24.C ; 73.1,45.19 72.82,44.9 U300.19 ; 73.1,45.19 72.73,45.55 U300.20
LED25: length 34.5
  TOP w0.203: LED25.C 111.58,55.5 90.5,55.5 89.56,54.56 89.56,50.19 90.88,48.87 92,48.87 ; U301.5 92.36,49.24 92,48.87 ; 92,48.87 92.28,48.59 U301.6
LED26: length 14.6
  TOP w0.203: 92,47.65 92.28,47.93 U301.7 ; 92,47.65 91.13,47.65 87.77,44.29 LED26.C ; 92,47.65 92.36,47.28 U301.8
LED27: length 57
  TOP w0.203: U301.9 92.3,46.63 92,46.33 ; 92,46.33 90.88,46.33 83.06,38.51 75.23,38.51 73.71,40.03 58.67,40.03 57.66,39.01 57.66,30.78 55.72,28.84 LED27.C ; 92,46.33 92.34,45.98 U301.10
LED28: length 23.6
  TOP w0.203: 92.1,45.01 92.43,45.33 U301.11 ; 92.1,45.01 90.52,45.01 88.54,43.03 88.54,29.03 88.73,28.84 LED28.C ; 92.1,45.01 92.42,44.68 U301.12
LED29: length 49.5
  TOP w0.203: 100.84,45.09 100.59,45.33 U301.14 ; 100.84,45.09 100.43,44.68 U301.13 ; 100.84,45.09 101.27,45.09 102.01,45.82 110.69,45.82 116.59,39.93 131.11,39.93 132.33,38.71 132.33,29.36 132.85,28.84 LED29.C
LED30: length 85.3
  TOP w0.203: U301.15 100.59,45.98 100.94,46.33 ; 100.94,46.33 111,46.33 116.79,40.54 164.74,40.54 170.64,34.65 170.64,29.45 171.25,28.84 LED30.C ; 100.94,46.33 100.63,46.63 U301.16
LED31: length 105.3
  TOP w0.203: 101.04,47.65 100.75,47.94 100.74,47.93 U301.18 ; 101.04,47.65 100.67,47.28 U301.17 ; 101.04,47.65 110.49,47.65 116.99,41.15 153.06,41.15 161.59,49.68 169.42,49.68 176.16,56.42 LED31.C
LED32: length 49.5
  TOP w0.203: 101.14,48.87 110.08,48.87 117.19,41.76 140.97,41.76 142.37,43.16 LED32.C ; 101.14,48.87 100.86,48.59 U301.19 ; 101.14,48.87 100.78,49.24 U301.20
LED33: length 110.3
  TOP w0.203: 118.77,48.87 118.41,48.87 116.28,46.74 116.28,43.43 117.45,42.27 131.52,42.27 139.44,50.19 169.11,50.19 178.76,59.84 178.76,72.24 180.81,74.28 LED33.C ; 118.77,48.87 119.14,49.24 U302.5 ; 118.77,48.87 119.05,48.59 U302.6
LED34: length 125.2
  TOP w0.203: LED34.C 179.88,92.15 178.15,90.42 178.15,60.05 168.87,50.76 139.2,50.76 131.22,42.77 117.75,42.77 116.99,43.54 116.99,46.23 118.41,47.65 118.77,47.65 ; 120.34,47.94 119.06,47.94 119.05,47.93 ; U302.8 119.14,47.28 118.77,47.65 ; 118.77,47.65 119.05,47.93 ; U302.7 119.05,47.93
LED35: length 136
  TOP w0.203: 118.67,46.23 118.91,45.98 U302.10 ; 118.67,46.23 119.07,46.63 U302.9 ; 118.67,46.23 118.21,46.23 117.7,45.72 117.7,43.69 118.11,43.28 130.91,43.28 138.89,51.26 168.66,51.26 177.55,60.15 177.55,93.17 172.82,97.89 LED35.C
LED36: length 153.8
  TOP w0.203: U302.11 119.22,45.33 118.97,45.09 ; 118.97,45.09 118.97,44.86 119.14,44.68 U302.12 ; 118.97,45.09 118.55,45.09 118.26,44.81 118.26,44.2 118.67,43.79 130.61,43.79 138.58,51.77 168.45,51.77 176.94,60.25 176.94,92.76 164.54,105.16 148.08,105.16 143.56,109.68 LED36.C
LED37: length 129.3
  TOP w0.203: U302.13 127.49,44.68 127.81,45.01 ; 127.81,45.01 131.01,45.01 138.34,52.34 168.21,52.34 176.33,60.45 176.33,92.35 164.39,104.29 LED37.C ; 127.81,45.01 127.49,45.33 U302.14
LED38: length 158.4
  TOP w0.203: U302.15 127.37,45.98 127.71,46.33 ; U302.16 127.41,46.63 127.71,46.33 ; 127.71,46.33 131.52,46.33 138.03,52.84 168,52.84 175.72,60.55 175.72,91.95 170.03,97.64 116.38,97.64 114.76,96.01 114.76,92.96 114.08,92.29 LED38.C
LED39: length 85.8
  TOP w0.203: U302.17 127.34,47.28 127.61,47.55 ; LED39.C 173.98,87.29 175.11,86.16 175.11,60.66 167.8,53.35 137.72,53.35 131.93,47.55 127.61,47.55 ; 127.61,47.55 127.22,47.93 ; 126.14,47.94 127.22,47.94 127.22,47.93 ; 127.22,47.93 U302.18
LED40: length 54.7
  TOP w0.203: 127.61,48.87 127.32,48.58 126.15,48.58 U302.19 ; 127.61,48.87 132.43,48.87 137.41,53.85 167.59,53.85 172.46,58.72 LED40.C ; 127.61,48.87 127.24,49.24 U302.20
OUTEN_FPC_F: length 164.9
  TOP w0.203: U300.21 73.18,46.2 74.01,47.04 74.01,51 71.68,53.34 70.66,53.34 v1(69.85,52.53) ; v1(123.9,54.15) 124.54,54.79 127.38,54.79 128.02,54.15 128.02,50.37 127.53,49.89 U302.21 ; P300.3 6.36,57.26 8.66,57.26 v1(8.97,57.57) ; v1(97.21,54.74) 97.4,54.94 100.46,54.94 101.35,54.05 101.35,50.5 100.74,49.89 U301.21
  BOTTOM w0.203: v1(123.9,54.15) 123.32,53.57 122.66,53.57 120.85,55.37 115.47,55.37 114.86,54.76 97.23,54.76 v1(97.21,54.74) 96.57,54.1 95.94,54.1 95.81,54.23 94.36,54.23 93.42,55.17 89.97,55.17 89.56,54.76 72.08,54.76 v1(69.85,52.53) 69.04,51.71 64.77,51.71 63.55,52.93 60.5,52.93 58.27,55.17 58.27,60.27 55.35,63.2 25.45,63.2 22.71,60.45 11.85,60.45 v1(8.97,57.57)
R_EXT_F1: length 4.1
  TOP w0.203: U300.23 70.4,47.5 70.05,47.85 70.05,49.25 69.85,49.45 R300.2
R_EXT_F2: length 3.5
  TOP w0.203: U301.23 98.42,51.19 97.84,51.76 97.84,52.27 R301.2
R_EXT_F3: length 3.6
  TOP w0.203: U302.23 124.89,51.19 123.7,52.37 R302.2
SDI_FPC_F: length 77.1
  TOP w0.203: P300.7 6.33,58.07 7.44,58.07 v1(8.05,58.68) ; v1(65.18,52.93) 64.44,52.2 64.44,47.74 64.68,47.5 U300.2
  BOTTOM w0.203: v1(8.05,58.68) 11.04,61.67 22.1,61.67 24.74,64.31 56.26,64.31 59.23,61.34 59.23,55.83 61.11,53.95 64.16,53.95 v1(65.18,52.93)
SDO_FPC_F_101: length 36.4
  TOP w0.203: U301.2 92.76,51.19 92.38,51.56 92.38,53.52 v1(93.09,54.23) ; v1(70.87,52.53) 71.68,52.53 73.41,50.8 73.41,47.57 72.68,46.85 U300.22
  BOTTOM w0.203: v1(70.87,52.53) 72.49,54.15 89.97,54.15 90.47,54.66 91.57,54.66 92,54.23 v1(93.09,54.23)
SDO_FPC_F_102: length 28.9
  TOP w0.203: U301.22 100.37,50.54 100.74,50.9 100.74,53.64 100.53,53.85 100.5,53.85 v1(100.13,54.23) ; U302.2 119.22,51.19 119.05,51.35 119.05,53.57 v1(119.43,53.95)
  BOTTOM w0.203: v1(119.43,53.95) 118.72,54.66 115.98,54.66 115.54,54.23 v1(100.13,54.23)
SDO_FPC_F_103: length 138.5
  TOP w0.203: v1(7.24,58.79) 6.93,58.48 6.33,58.48 P300.9 ; v1(126.14,54.15) 126.67,54.15 127.41,53.42 127.41,50.9 127.04,50.54 U302.22
  BOTTOM w0.203: v1(126.14,54.15) 123.9,56.39 115.16,56.39 114.35,55.58 98.09,55.58 97.89,55.78 96.67,55.78 96.27,55.37 94.64,55.37 94.03,55.98 89.15,55.98 88.75,55.58 71.07,55.58 70.26,54.76 61.11,54.76 59.69,56.18 59.69,61.77 56.74,64.72 24.54,64.72 21.89,62.08 10.53,62.08 v1(7.24,58.79)

## Copper pours and planes (outline as drawn; the poured copper is in the pictures)
2.8V_FPC_F on TOP (solid shape): 32.66,65.94 32.66,58.62 32.46,58.42 29.62,58.42 29.41,58.62 29.41,65.94 29.82,66.34 32.26,66.34
2.8V_FPC_F on TOP (solid shape): 4.89,58.17 5.09,57.15 4.99,56.95 3.38,56.64 2.9,56.56 2.84,56.55 2.76,56.64 2.55,57.86 2.66,57.96 4.69,58.27
2.8V_FPC_F on TOP (solid shape): 84.28,48.46 84.28,46.63 84.07,46.43 81.03,46.43 80.62,46.02 80.62,39.32 80.42,39.12 78.38,39.12 78.18,39.32 78.18,48.46 78.59,48.87 83.87,48.87
2.8V_FPC_F on TOP (solid shape): 4.29,62.54 4.6,60.72 4.5,60.51 4.39,60.41 2.98,60.21 2.53,60.14 2.46,60.21 2.16,62.24 2.16,62.34 2.34,62.37 2.63,62.41 2.67,62.42 4.09,62.65
2.8V_FPC_F on BOTTOM (solid shape): outline of 424 points within 2.34,28.02 198.6,124.38
3.3V_FPC_F on TOP (solid shape): 100.33,53.24 100.33,51.79 100.18,51.64 98.63,51.64 98.5,51.77 98.5,53.24 98.6,53.34 100.23,53.34
3.3V_FPC_F on TOP (solid shape): 127,53.24 127,51.77 126.87,51.64 125.4,51.64 125.17,51.87 125.17,53.34 125.27,53.44 126.8,53.44
3.3V_FPC_F on TOP (solid shape): 72.39,50.85 72.39,48.11 72.24,47.96 70.46,47.96 70.36,48.06 70.36,50.88 70.54,51.05 72.19,51.05
3.3V_FPC_F on TOP (solid shape): 3.68,56.45 3.68,56.44 3.73,55.96 3.68,55.91 3.38,55.85 2.97,55.78 2.97,55.73 3.15,54.74 3.38,54.52 3.68,54.52 6.63,55 6.63,55 6.83,55.33 6.83,55.94 6.93,56.14 7.85,56.14 7.95,56.04 7.95,55.23 7.34,54.33 7.24,54.32 3.99,53.71 2.87,53.71 2.67,53.91 2.26,55.74 2.16,56.14 2.19,56.25 2.34,56.28 3.63,56.5
DGND_FPC_F on TOP (solid shape): 6.33,56.04 6.43,55.33 6.33,55.13 3.48,54.72 3.28,54.92 3.18,55.64 5.61,56.04 6.12,56.14
DGND_FPC_F on TOP (solid shape): 123.11,53.34 123.11,52.45 124.87,50.7 124.87,45.82 124.66,45.62 121.72,45.62 121.61,45.72 121.61,51.31 121.28,51.64 119.48,51.64 119.43,51.69 119.43,53.21 119.68,53.47 122.99,53.47
DGND_FPC_F on TOP (solid shape): 96.44,53.34 96.44,52.45 98.2,50.7 98.2,45.82 97.99,45.62 95.05,45.62 94.94,45.72 94.94,51.31 94.61,51.64 92.89,51.64 92.76,51.77 92.76,53.21 93.01,53.47 96.32,53.47
DGND_FPC_F on TOP (solid shape): 68.53,49.96 68.53,48.95 68.73,48.74 69.54,48.74 69.75,48.54 69.75,47.62 70.26,47.12 70.26,42.04 70.05,41.83 67.21,41.83 67,42.04 67,47.62 66.67,47.96 64.95,47.96 64.87,48.03 64.87,49.86 65.07,50.06 68.43,50.06
DGND_FPC_F on TOP (solid shape): 18.44,67.46 18.44,53.24 14.63,52.66 13.54,52.5 10.18,51.99 3.89,51.05 3.72,51.07 3.38,51.27 2.97,52.69 2.97,53.1 3.18,53.3 4.09,53.3 7.68,54.15 10.69,57.16 10.69,57.87 9.17,59.4 6.43,59.4 5.64,58.61 5.54,58.6 5.34,58.56 5.18,58.54 5.12,58.53 4.87,58.48 2.06,58.07 1.75,58.28 0.84,64.98 1.04,65.29 1.96,65.44 2.67,65.59 2.87,65.49 3.18,63.87 3.07,63.66 2.51,63.39 1.98,63.3 1.91,63.28 1.8,63.1 1.8,63.05 2.26,60.08 2.29,60.06 2.46,59.95 2.95,60.03 5.39,60.41 5.49,60.49 5.54,60.56 5.64,60.71 5,64.42 4.88,64.64 4.37,64.64 4.17,64.65 4.02,65.62 3.92,66.2 3.98,66.3 4.05,66.38 4.24,66.42 18.21,67.69
DGND_FPC_F on BOTTOM (solid shape): 3.48,67.56 3.48,64.14 2.08,62.74 2.34,60.71 3.23,56.26 3.48,56.01 6.15,56.01 7.04,55.12 9.96,55.12 12.85,58.01 23.52,58.01 26.57,61.06 54.03,61.06 56.57,58.52 56.57,53.85 59.61,50.8 61.26,50.8 62.41,49.66 72.01,49.66 74.47,52.12 125.22,52.12 125.27,52.07 126.19,52.07 126.54,51.71 126.54,45.21 125.32,43.99 84.28,43.99 81.23,40.94 49.12,40.94 49.12,53.54 48.72,53.95 39.06,53.95 29.82,53.44 29.31,54.76 29.11,54.76 26.57,54.56 13.77,52.53 4.9,51.21 3.96,51.05 3.68,51.05 3.43,51.16 3.28,51.41 2.87,53.11 2.29,55.58 1.68,58.72 1.27,61.29 1.14,62.18 0.94,63.73 0.56,67.34 0.91,67.69 3.35,67.69

## Text on the board
Ref Des/Silkscreen Top: DVT2 | TO U BOARD | OSVR FRONT COVE | Rev:A | P/N:42.A0321G002
NCLEGEND-1-2: FIGURE | SIZE | 12.0 | 158.0 | DRILL CHART: TOP to BOTTOM | ALL UNITS ARE IN MILS | PLATED | NON-PLATED | QTY | 304 | 2
User.9: 40 | 2 | 39
